# Altium PCB PCB1.PcbDoc
Units mm, origin at the board's own origin, x right, y up, seen from the top; angles counter-clockwise.
Board outline 36 x 36 mm, 4 copper layers (Top Layer, Mid Layer 1, Mid Layer 2, Bottom Layer), stack 1.57 mm thick; 39 components, 28 nets, 148 pads, 37 vias.
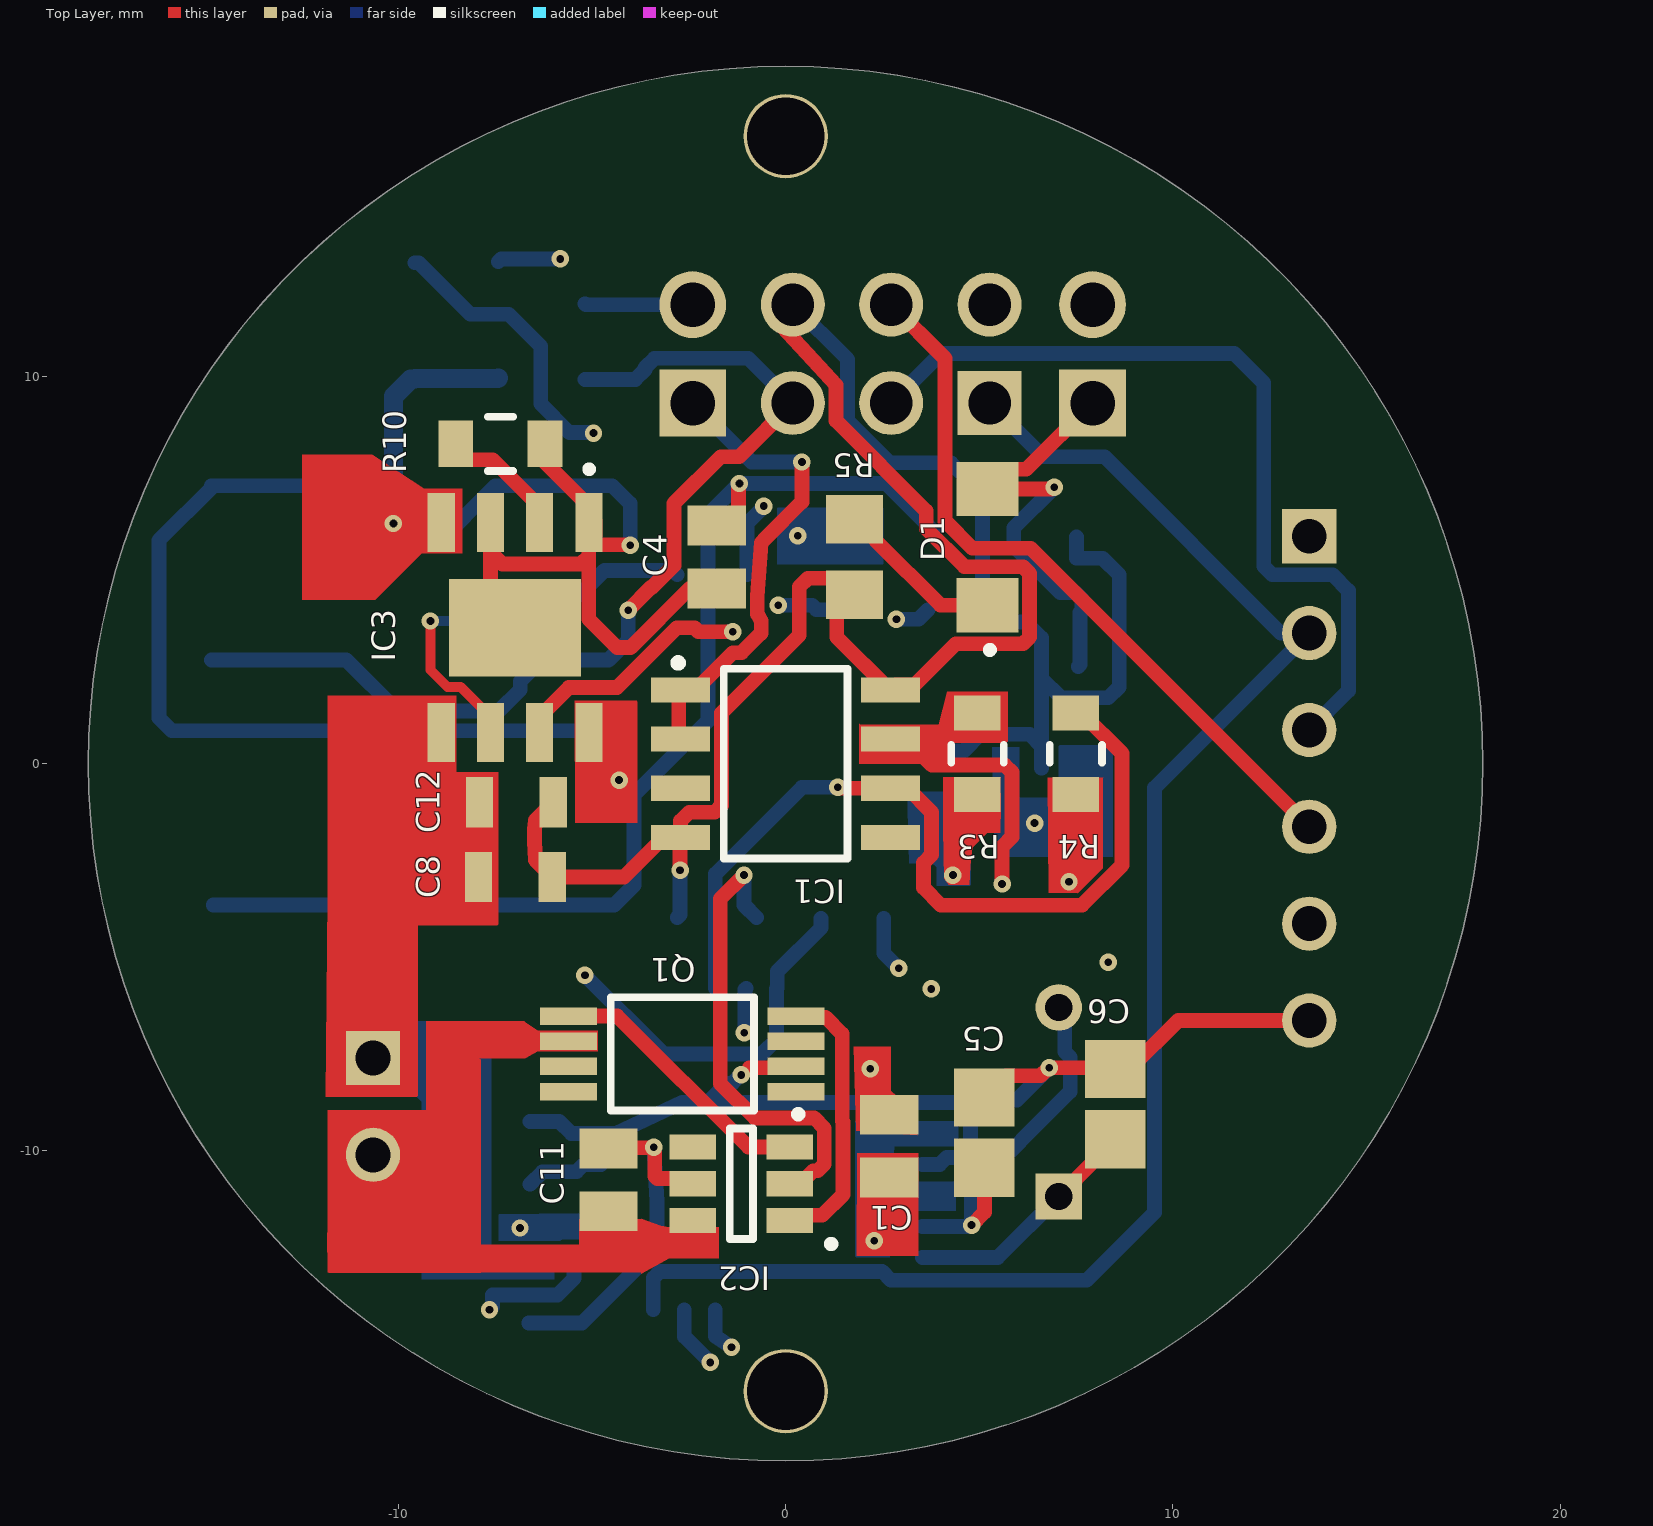
[diagram p0: Top Layer view]
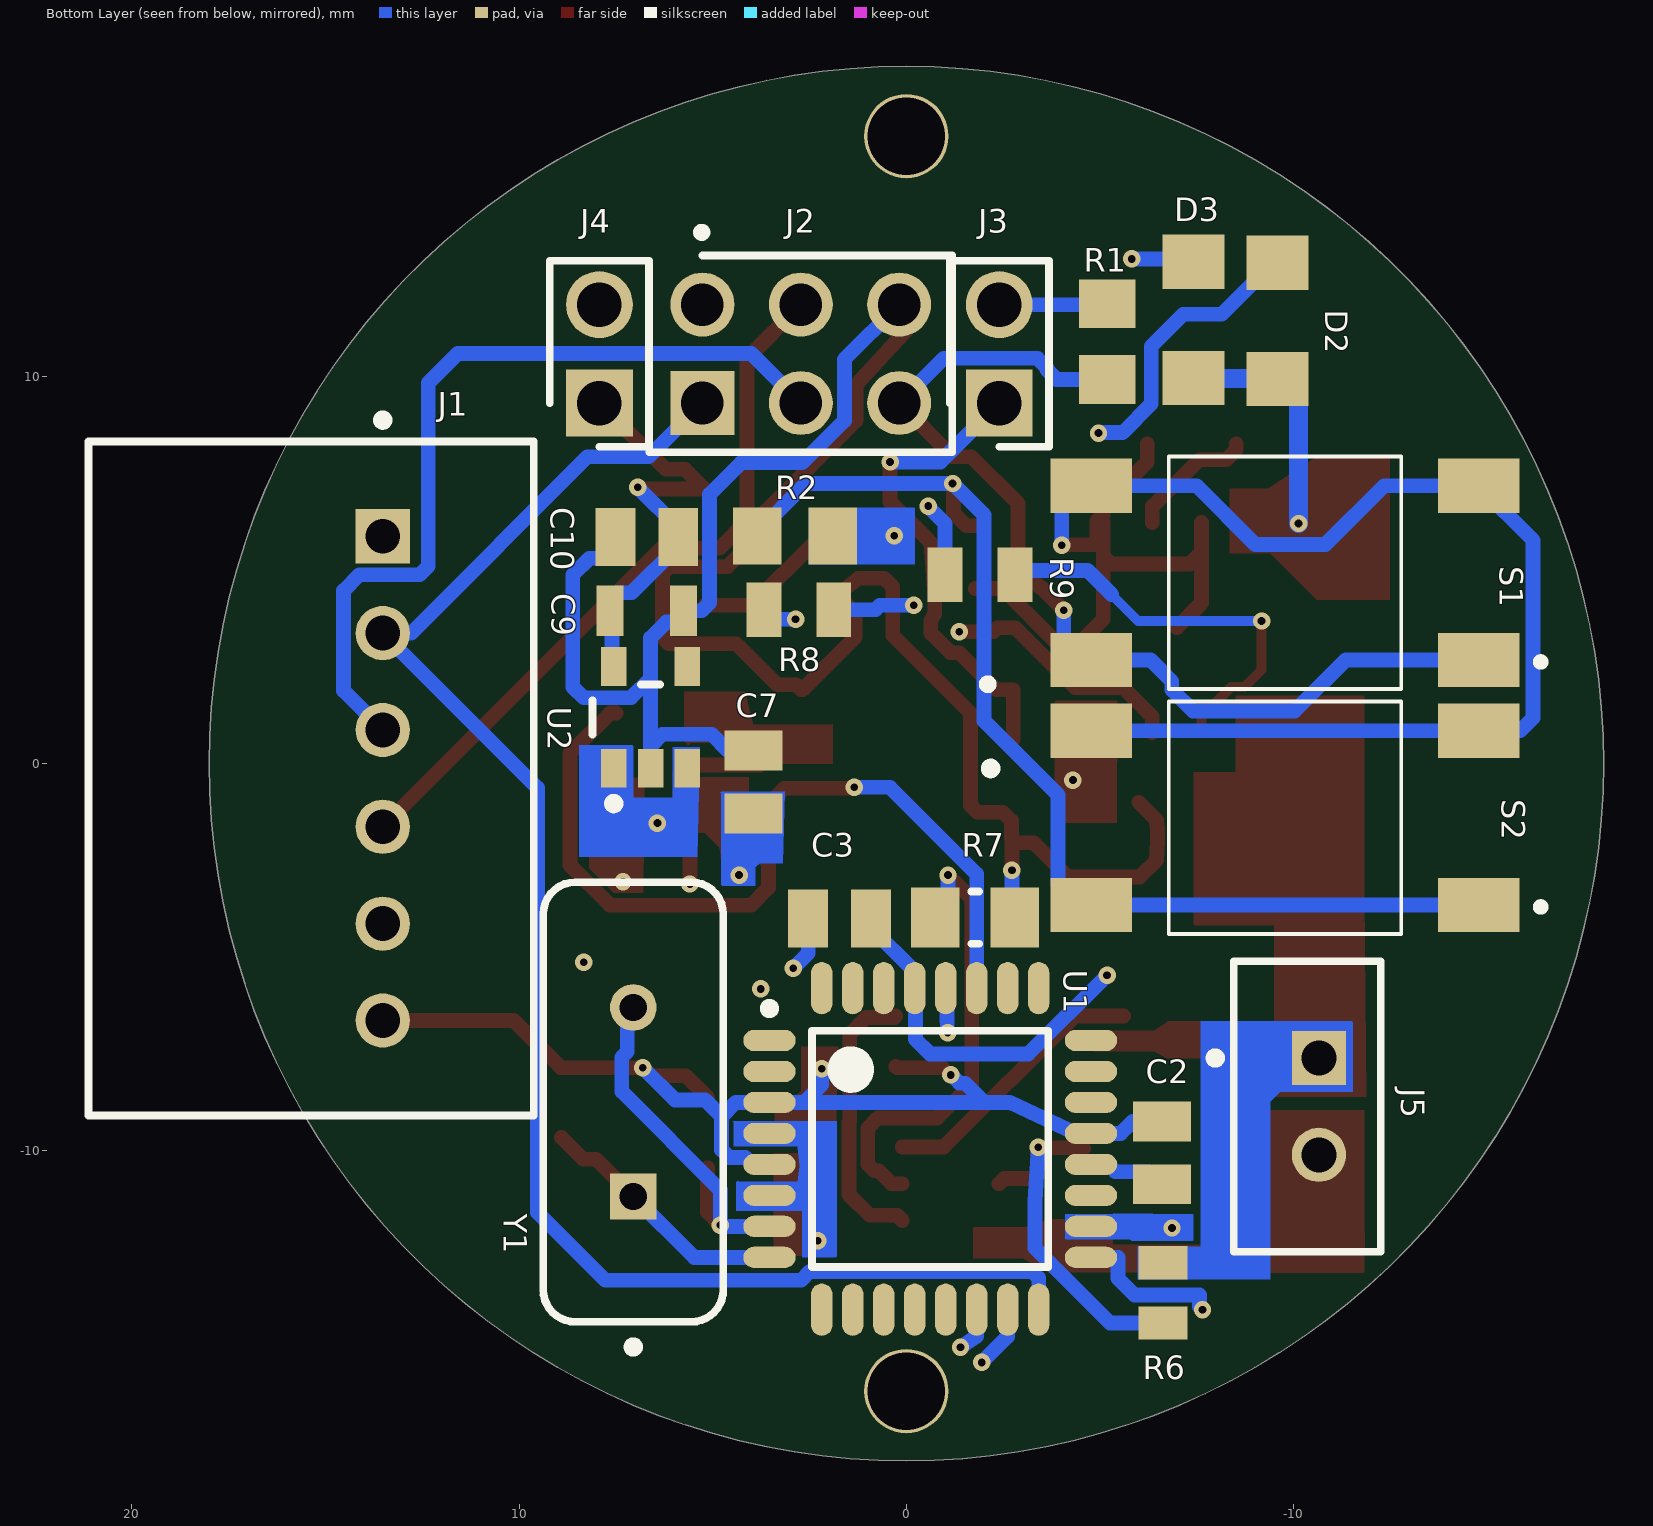
[diagram p1: Bottom Layer view, seen from below]
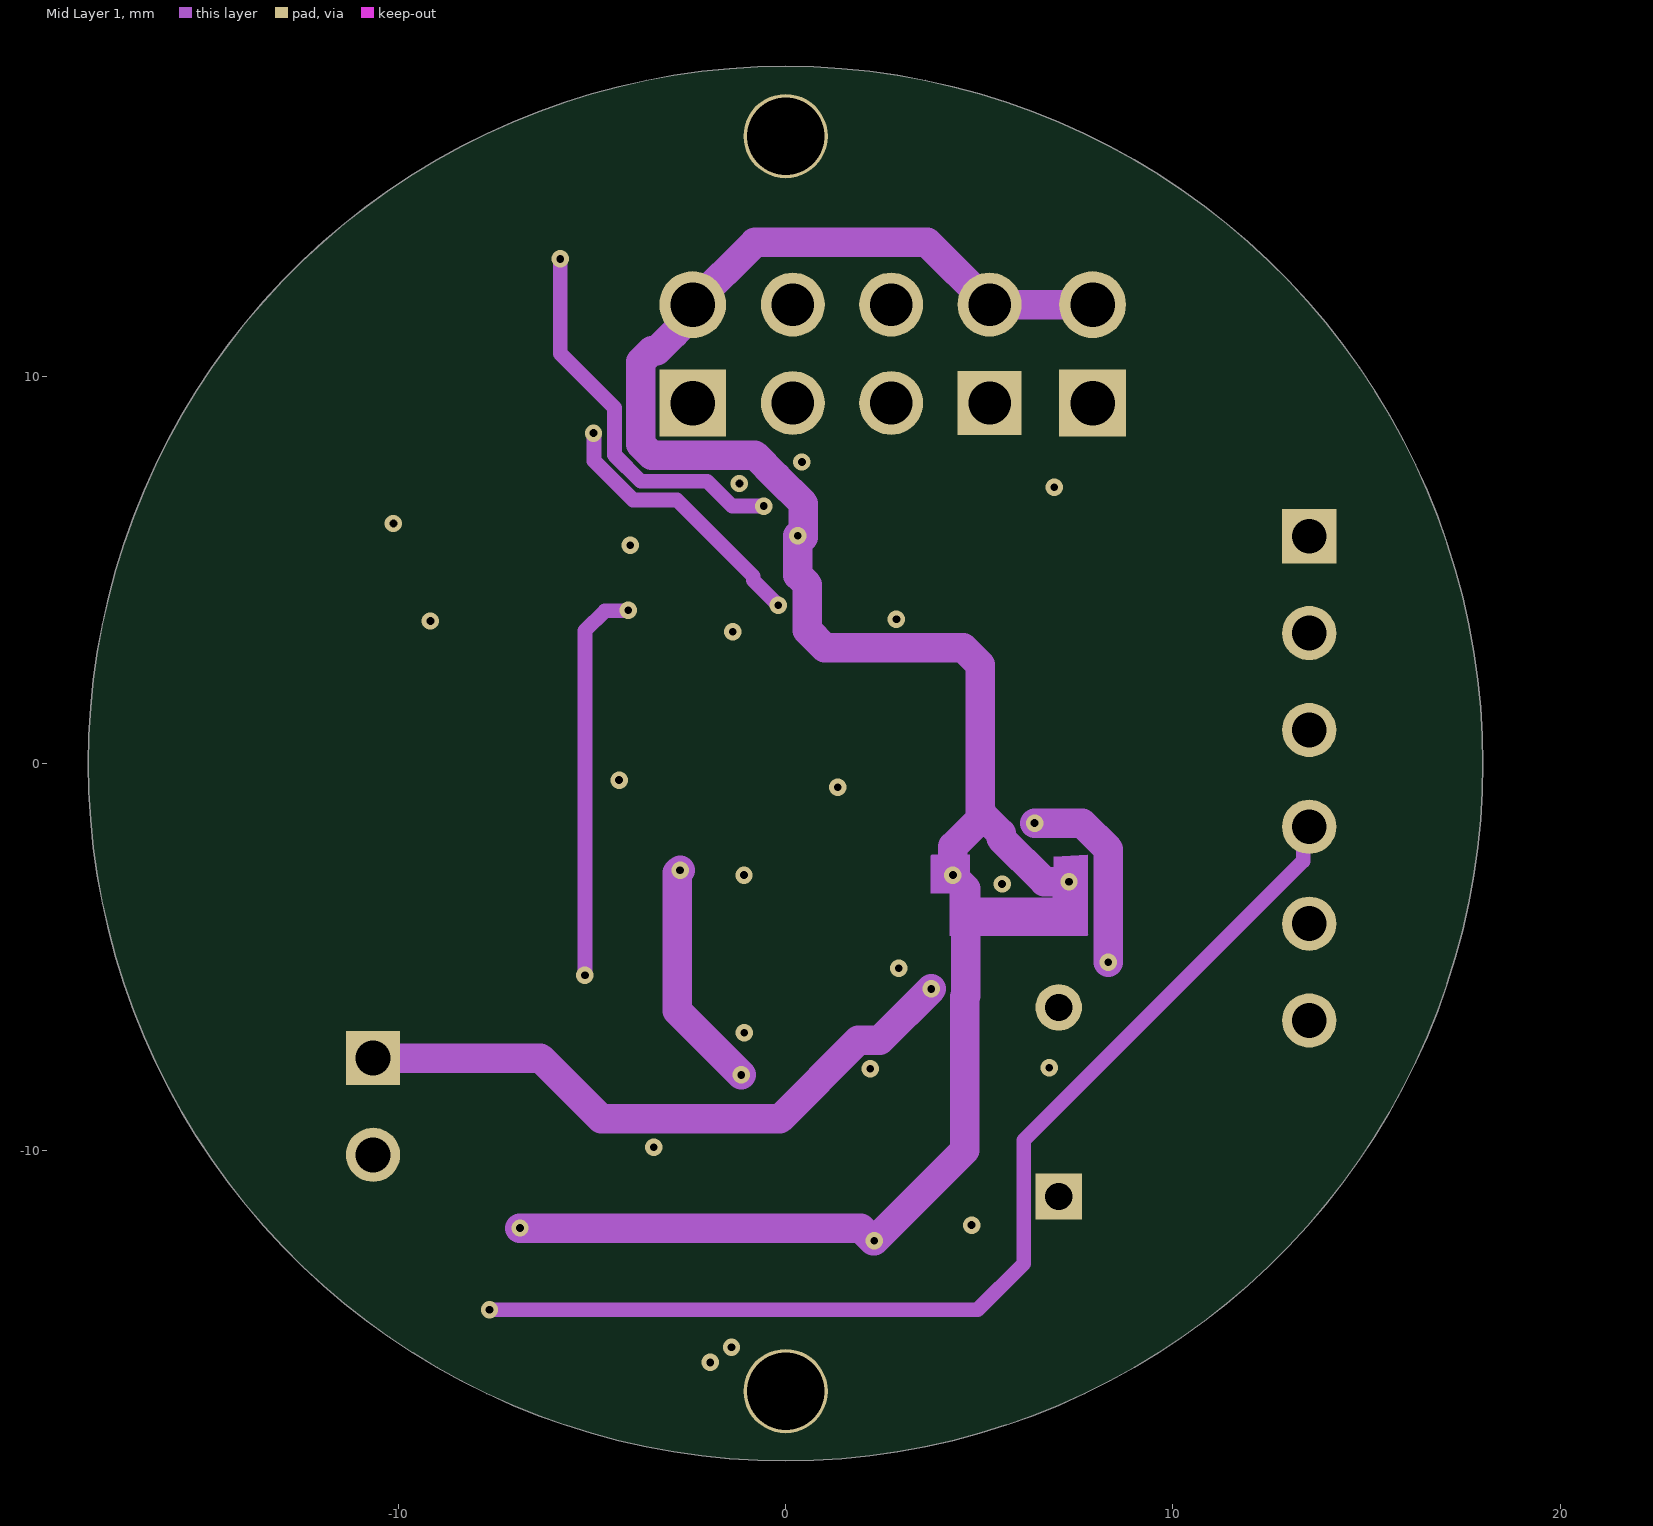
[diagram p2: Mid Layer 1]
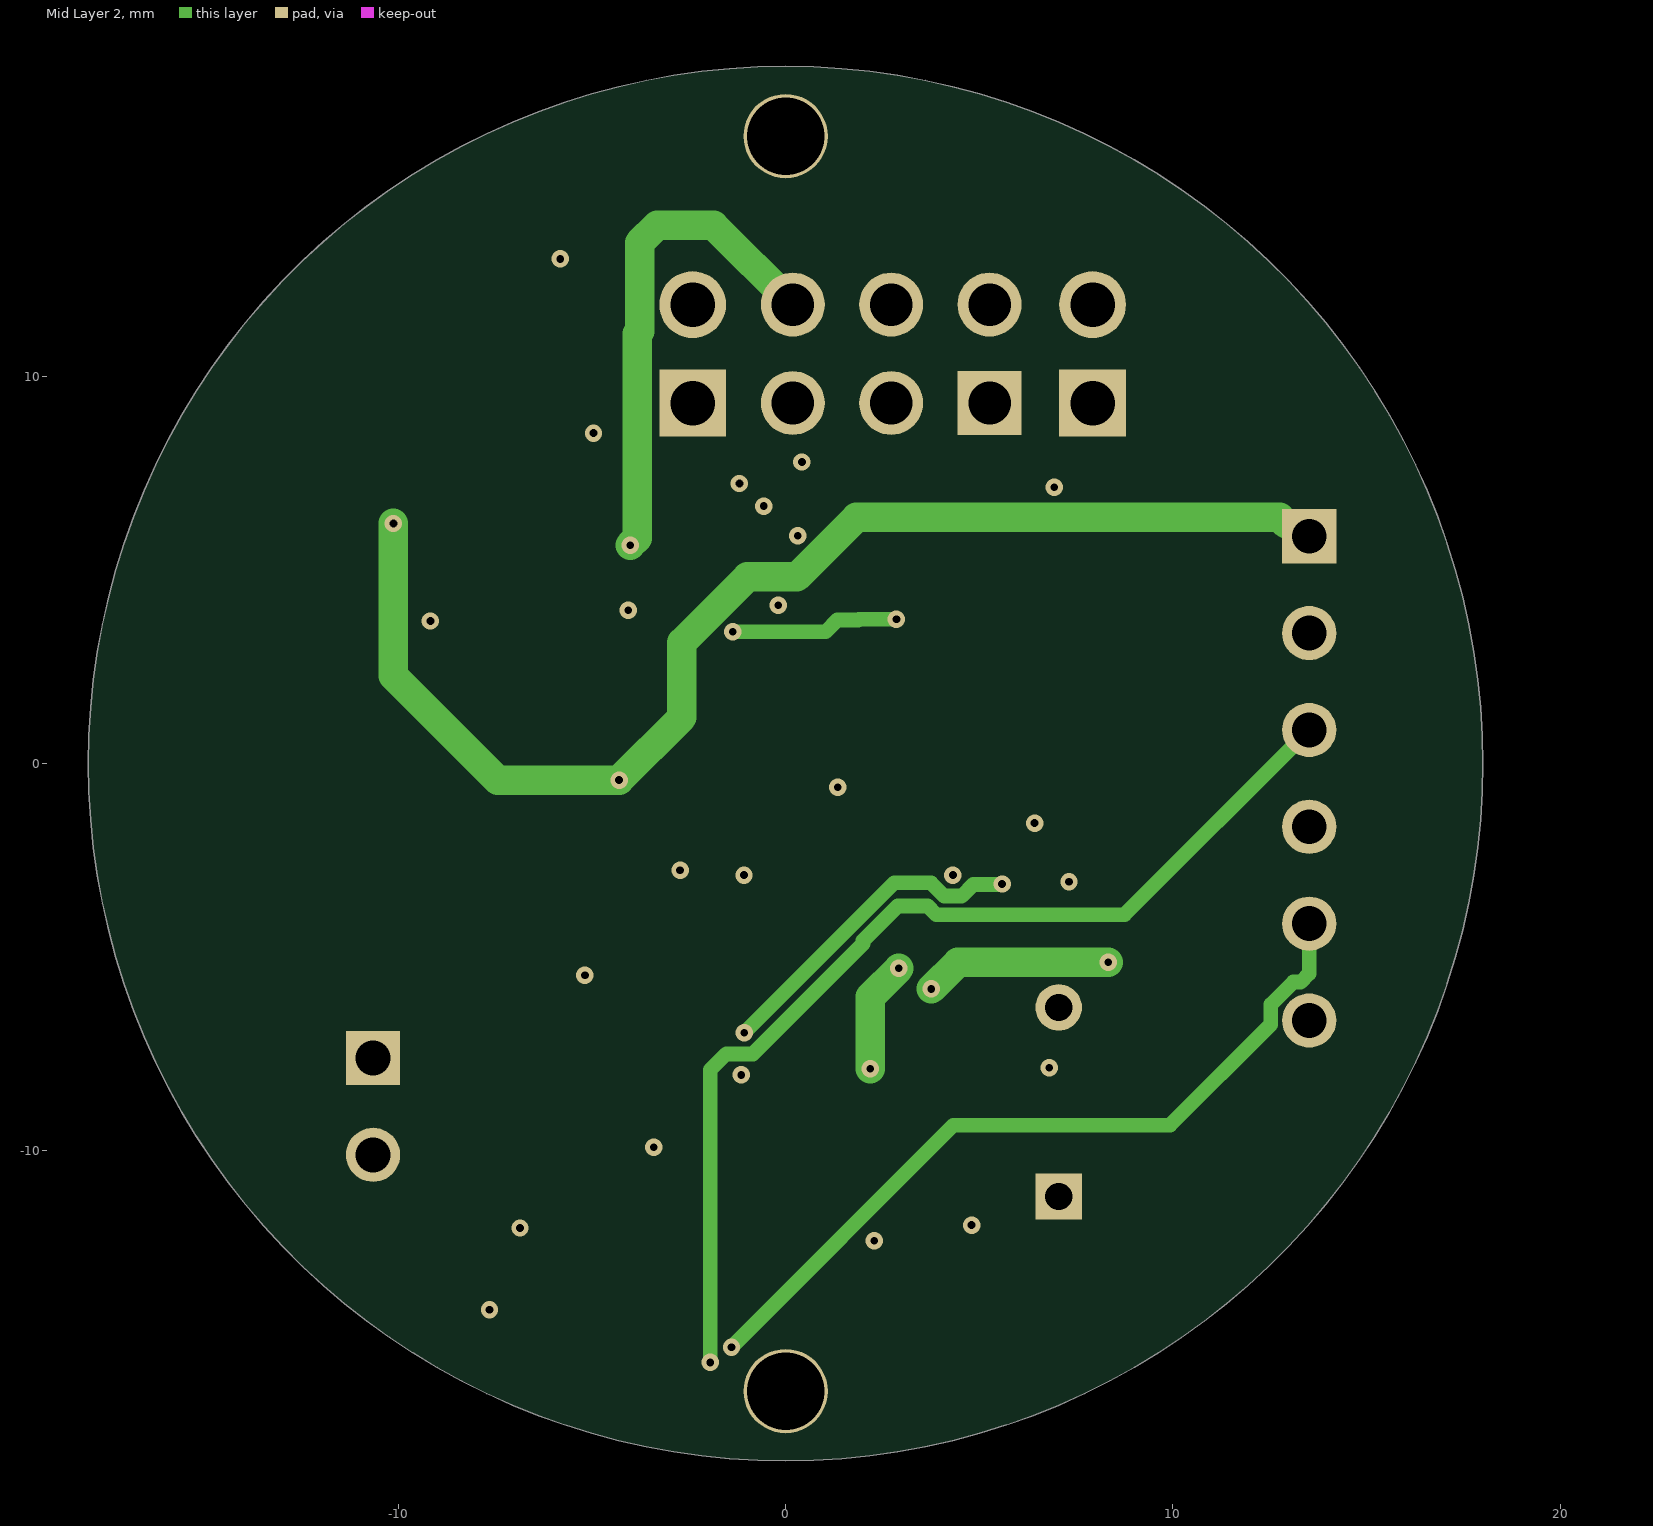
[diagram p3: Mid Layer 2]
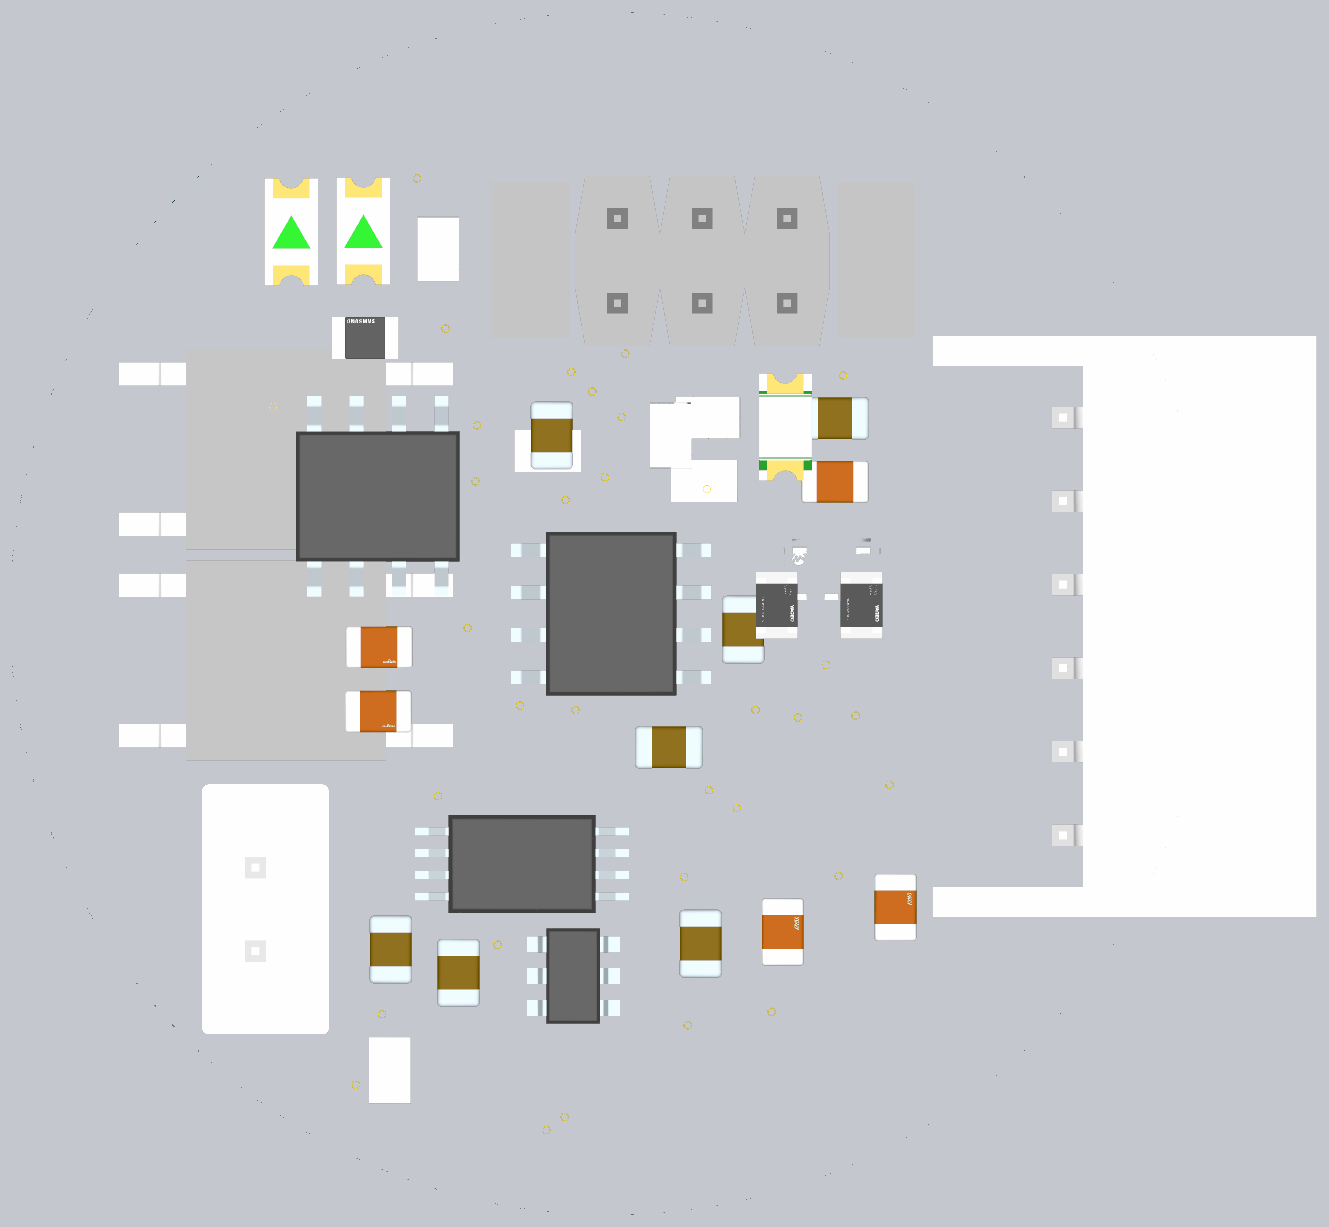
[diagram p4: 3D render of the assembled board from above, using the file's embedded part models]
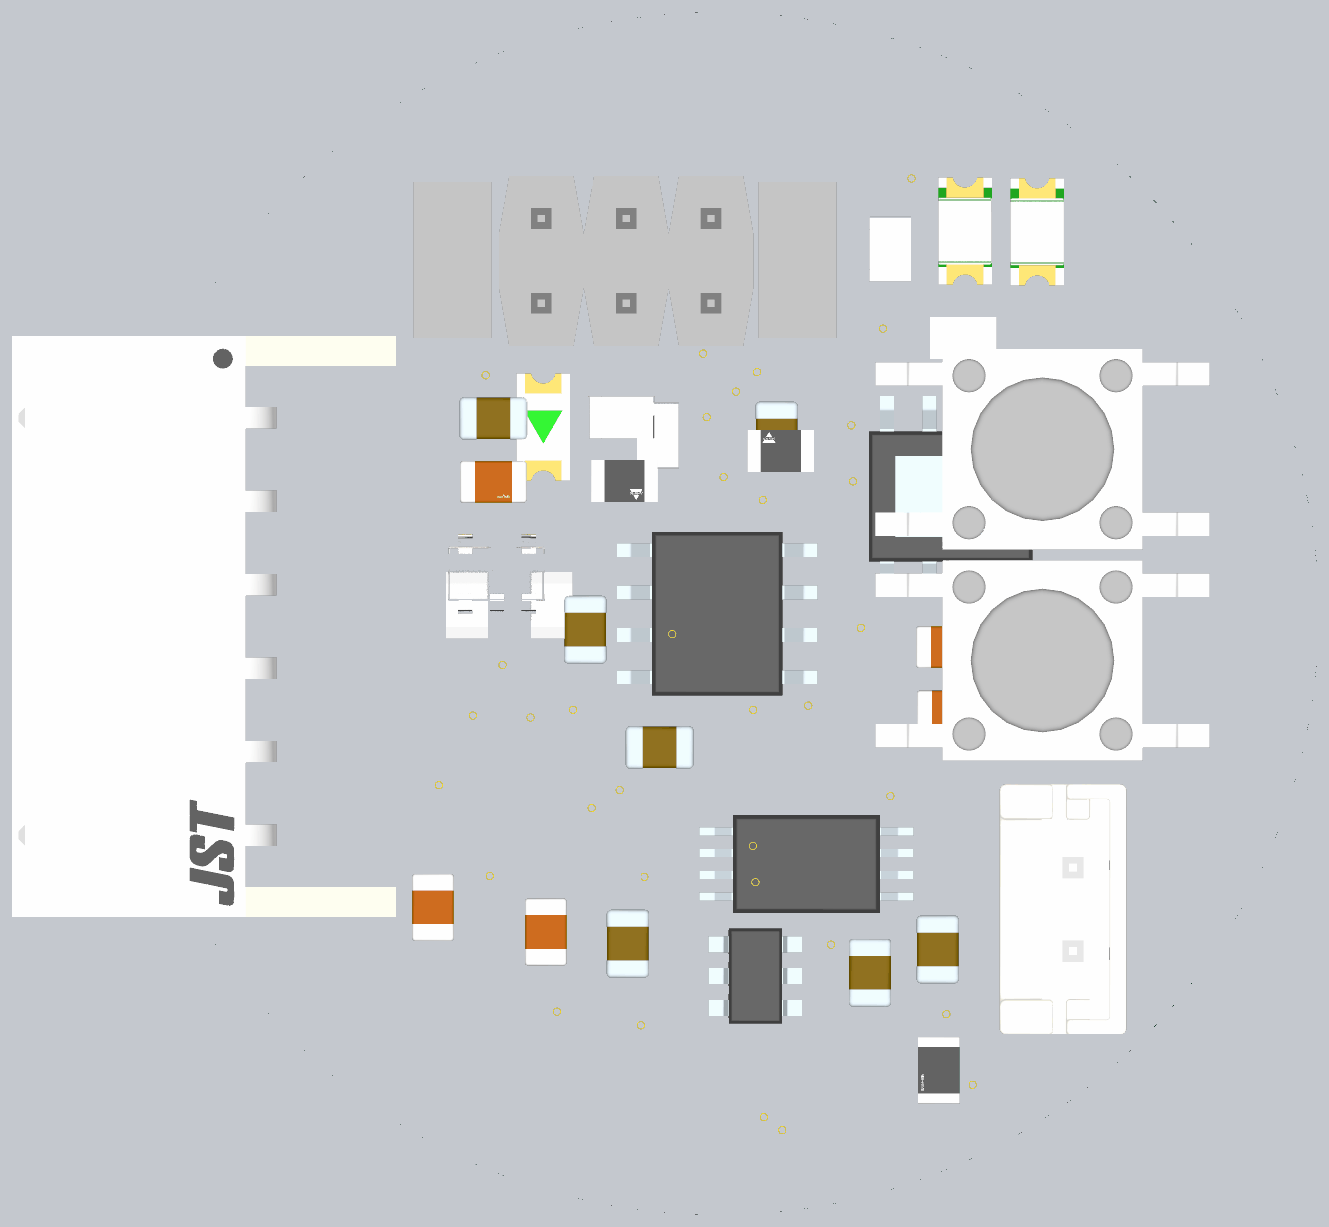
[diagram p5: 3D render of the assembled board from below, using the file's embedded part models]

## Layer stack, top to bottom
Top Solder: solder mask 0.0127, Solder Resist, Dk 3.8
Top Layer: signal copper 0.035
Dielectric 1: prepreg 0.1, 2313, Dk 4.05
Mid Layer 1: signal copper 0.0175
Core: core 1.265, FR-4, Dk 4.5
Mid Layer 2: signal copper 0.0175
Dielectric 2: prepreg 0.1, 2313, Dk 4.05
Bottom Layer: signal copper 0.035
Bottom Solder: solder mask 0.0127, Solder Resist, Dk 3.8

## Board outline
-18,0 ccw(c0,0) 0,-18 ccw(c0,0) 18,0 ccw(c0,0) 0,18 ccw(c0,0)

## Design rules (kind name [scope] priority, off if disabled: settings)
BoardOutlineClearance [All] p1: gap=0.2 ignorepadtopadclearanceinfootprint=FALSE
Clearance [All] p1: gap=0.102 ignorepadtopadclearanceinfootprint=FALSE except(0.127: Arc-Via Track-Via SMDPad-Via THPad-Via Via-Via Via-Fill Via-Poly Via-Region Via-Text; 0.25: Arc-Hole Track-Hole SMDPad-Hole THPad-Hole Via-Hole Fill-Hole Poly-Hole Region-Hole Text-Hole)
ComponentClearance [All] p1: gap=0.102 collisioncheckmode=3 verticalgap=0.102 showdistances=TRUE
DiffPairsRouting [All] p1: maxlimit=0.102 minlimit=0.102 mostfreqgap=0.102 toplayer_minwidth=0.102 toplayer_maxwidth=1816.048 toplayer_prefwidth=0.102 midlayer1_minwidth=0.102 midlayer1_maxwidth=1816.048 midlayer1_prefwidth=0.102 midlayer2_minwidth=0.102 midlayer2_maxwidth=1816.048 midlayer2_prefwidth=0.102 bottomlayer_minwidth=0.102 bottomlayer_maxwidth=1816.048 bottomlayer_prefwidth=0.102 maxuncoupledlength=12.7
Height [All] p1: minheight=0 maxheight=1816.048 prefheight=12.7
HoleSize [All] p1: absolutevalues=TRUE maxlimit=6.3 minlimit=0.2 maxpercent=80.000 minpercent=20.000
HoleToHoleClearance [All] p1: gap=0.25 allowstackedmicrovias=FALSE
MinimumAnnularRing [All] p1: minimumring=0.076
MinimumSolderMaskSliver [All] p1: minsoldermaskwidth=0
PlaneClearance [All] p1: clearance=0.102
PlaneConnect PlaneConnectPowerPads [InPadClass('PowerPads')] p1: planeconnectstyle=Direct reliefexpansion=0.508 reliefentries=4 reliefconductorwidth=0.254 reliefairgap=0.254
PlaneConnect [All] p2: pad.planeconnectstyle=Relief pad.reliefexpansion=0.3 pad.reliefentries=4 pad.reliefconductorwidth=0.102 pad.reliefairgap=0.102 via.planeconnectstyle=Direct via.reliefexpansion=0.3 via.reliefentries=4 via.reliefconductorwidth=0.127 via.reliefairgap=0.127
PolygonConnect PolygonConnectPowerPads [All vs (InPadClass('PowerPads'))] p1: connectstyle=Direct reliefconductorwidth=0.254 reliefentries=4 polygonreliefangle="90 Angle" airgapwidth=0.254
PolygonConnect [All] p2: thpad.connectstyle=Relief thpad.reliefconductorwidth=0.102 thpad.reliefentries=4 thpad.polygonreliefangle="90 Angle" thpad.airgapwidth=0.102 smdpad.connectstyle=Relief smdpad.reliefconductorwidth=0.102 smdpad.reliefentries=4 smdpad.polygonreliefangle="90 Angle" smdpad.airgapwidth=0.102 via.connectstyle=Direct via.reliefconductorwidth=0.127 via.reliefentries=4 via.polygonreliefangle="90 Angle" via.airgapwidth=0.127
RoutingVias [All] p1: holewidth=0.2 width=0.45 viastyle="Through Hole" minholewidth=0.2 minwidth=0.45 maxholewidth=6.3 maxwidth=6.55
SilkToSilkClearance [All] p1: silktosilkclearance=0
SilkToSolderMaskClearance [IsPad] p1: minsilkscreentomaskgap=0.102 clearancetoexposedcopper=TRUE
SolderMaskExpansion [All] p1: expansion=0.075 istentingtop=FALSE
Width [All] p1: maxlimit=1816.048 minlimit=0.102 preferedwidth=0.381
20 further rules are at their usual default settings.

## Classes and differential pairs
component class "Voltage Regulator Circuit": C8 C9 C10 D1 J4 R5 U2
component class "Microcontroller Circuit": C1 C2 C3 C4 C5 C6 J2 R1 S1 S2 U1 Y1
component class "Hall Effect IC Circuit": C7 IC1 J3 R3 R4
component class "Encode Schematic": J1
component class "Battery Protection Circuit": C11 IC2 J5 Q1 R6 R7
component class "Battery Charging Circuit": C12 D2 D3 IC3 R8 R9 R10

## Components (designator, comment, footprint, x,y, rotation, side; value= is the part's Value field where it differs from the comment)
C1 "0805B104K500NT" CAPC2013X137N 2.675,-9.875 r90 top value=100nF
C2 "0805B104K500NT" CAPC2013X137N -6.6,-10.05 r90 bottom value=100nF
C3 "0805B104K500NT" CAPC2013X137N 1.725,-4 r0 bottom value=100nF
C4 "0805B104K500NT" CAPC2013X137N -1.778,5.334 r270 top value=100nF
C5 "08051A220K4T2A" FP-0805-L_2_01_0_2-W_1_25-IPC_A 5.131,-9.525 r90 top
C6 "08051A220K4T2A" FP-0805-L_2_01_0_2-W_1_25-IPC_A 8.509,-8.788 r90 top
C7 "0805B104K500NT" CAPC2013X137N 3.95,-0.475 r90 bottom value=100nF
C8 "GCM21BC71E106KE36L" FP-GCM21B-0_2-e0_2_0_7-MFG -6.975,-2.925 r0 top value=10uF
C9 "GCM21BC71E106KE36L" FP-GCM21B-0_2-e0_2_0_7-MFG 6.7,3.95 r180 bottom value=10uF
C10 "0805B104K500NT" CAPC2013X137N 6.7,5.85 r0 bottom value=100nF
C11 "0805B104K500NT" CAPC2013X137N -4.572,-10.747 r270 top value=100nF
C12 "GCM21BC71E106KE36L" FP-GCM21B-0_2-e0_2_0_7-MFG -6.95,-1 r0 top value=10uF
D1 "150120BS75000" WL-SMCW_1206_150120xx75000 5.207,5.588 r90 top
D2 "150120AS75000" WL-SMCW_1206_150120xx75000 -9.576,11.43 r270 bottom
D3 "150120GS75000" WL-SMCW_1206_150120xx75000 -7.417,11.455 r270 bottom
IC1 "AS5600-ASOM" SOIC127P600X175-8N 0,0 r0 top
IC2 "DW01A-G" SOT95P280X135-6N -1.143,-10.846 r180 top
IC3 "TP4056" SOIC127P600X175-9N -6.985,3.511 r270 top
J1 "S6B-XH-A-1(LF)(SN)" FP-S6B-XH-A-1_LF_SN-MFG 15.367,-0.381 r90 bottom
J2 "90131-0763" HDRV6W90P254_2X3_762X500X560P 5.265,9.31 r180 bottom
J3 "87527-2" HDRV2W66P0X254_1X2_467X244X1044P -2.4,9.309 r270 bottom
J4 "87527-2" HDRV2W66P0X254_1X2_467X244X1044P 7.925,9.309 r270 bottom
J5 "BATTERY IN" FP-B2B-EH-A_LF_SN-MFG -10.35,-8.85 r270 bottom
Q1 "FS8205A" SOP65P640X120-8N -2.667,-7.493 r180 top
R1 "CR0805-FX-1002ELF" FP-CR0805-IPC_A -5.182,10.897 r90 bottom value=10kΩ
R2 "CR0805-FX-1002ELF" FP-CR0805-IPC_A 2.875,5.875 r180 bottom value=10kΩ
R3 "RT0805DRE074K7L" FP-RT0805-MFG 4.953,0.254 r270 top value=4.7kΩ
R4 "RT0805DRE074K7L" FP-RT0805-MFG 7.493,0.254 r270 top value=4.7kΩ
R5 "CR0805-FX-1002ELF" FP-CR0805-IPC_A 1.778,5.334 r90 top value=10kΩ
R6 "ESR10EZPF1000" FP-ESR10-IPC_C -6.629,-13.665 r90 bottom
R7 "RK73B2ATTD102J" RESC2013X60X30ML20T20 -1.775,-3.975 r0 bottom value=1kΩ
R8 "MCU08050D6800BP500" FP-MCU0805-MFG 2.775,3.975 r180 bottom value=680Ω
R9 "MCU08050D6800BP500" FP-MCU0805-MFG -1.9,4.875 r0 bottom value=680Ω
R10 "RC2012F202CS" FP-RC2012-MFG -7.366,8.255 r180 top value=2kΩ
S1 "1301.9315.24" 13019319 -10.625,4.925 r0 bottom
S2 "1301.9315.24" 13019319 -10.625,-1.4 r0 bottom
U1 "ATmega88PA-AU" 32A_L -0.616,-9.947 r180 bottom
U2 "MIC5205-3.3YM5-TR" FP-M5-MFG 6.604,1.194 r90 bottom
Y1 "FOXSLF/080-20" FOX-FOXSLF080-20 7.05,-8.735 r90 bottom value=8MHz

## Footprints (in the part's own frame and the unit in brackets; to place one, negate y for a bottom-side part, rotate by r counter-clockwise, add the part's x,y. Pads: shape width x height; smd on the part's side, far side on the other; paste and mask are expansions set on the pad)
32A_L [mm] "Thin QFP, 32-Leads, Body 7x7mm, Pitch 0.8mm, IPC High Density"
  oval 1.35x0.55 smd: 1(-4.15,2.8) 2(-4.15,2) 3(-4.15,1.2) 4(-4.15,0.4) 5(-4.15,-0.4) 6(-4.15,-1.2) 7(-4.15,-2) 8(-4.15,-2.8) 17(4.15,-2.8) 18(4.15,-2) 19(4.15,-1.2) 20(4.15,-0.4) 21(4.15,0.4) 22(4.15,1.2) 23(4.15,2) 24(4.15,2.8)
  oval 0.55x1.35 smd: 9(-2.8,-4.15) 10(-2,-4.15) 11(-1.2,-4.15) 12(-0.4,-4.15) 13(0.4,-4.15) 14(1.2,-4.15) 15(2,-4.15) 16(2.8,-4.15) 25(2.8,4.15) 26(2,4.15) 27(1.2,4.15) 28(0.4,4.15) 29(-0.4,4.15) 30(-1.2,4.15) 31(-2,4.15) 32(-2.8,4.15)
  silkscreen extent -4.28,-3.05 3.05,3.75, body extent -3.5,-3.5 3.5,3.5, height 1.2
13019319 [mm]
  rect 2.1x1.4 smd: 1(-4.15,2.25) 2(5.85,2.25) 3(-4.15,-2.25) 4(5.85,-2.25)
  silkscreen extent -5.85,-3 3.85,3, body extent -4.11,-3 5.89,3, height 4.31
CAPC2013X137N [mm]
  rect 1.03x1.5 smd: 1(-0.81,0) 2(0.81,0)
  body extent -1.01,-0.64 1.01,0.64, height 1.37
FOX-FOXSLF080-20 [mm] "THD, 2-Leads, Body 11.35x4.65mm"
  rect 1.2x1.2 hole 0.7: 1(-2.44,0)
  round 1.2 hole 0.7: 2(2.44,0)
  silkscreen extent -6.45,-2.32 5.68,2.33, body extent -5.67,-2.32 5.68,2.33, height 3.6
FP-0805-L_2_01_0_2-W_1_25-IPC_A [mm]
  rect 1.505x1.556 smd paste+0 mask+0: 1(-0.906,0) 2(0.906,0)
  body extent -2.16,-1.28 2.16,1.28, height 0.25
FP-B2B-EH-A_LF_SN-MFG [mm]
  rect 1.4x1.4 hole 0.9 paste-2539.97 mask+0: 1(-1.25,0.3)
  round 1.4 hole 0.9 paste-2539.97 mask+0: 2(1.25,0.3)
  silkscreen extent -3.75,-2.5 3.75,1.9, body extent -3.75,-1.9 3.75,1.9, height 6
FP-CR0805-IPC_A [mm]
  rect 1.258x1.462 smd paste+0 mask+0: 1(-0.977,0) 2(0.977,0)
  body extent -1,-0.63 1,0.63, height 0.6
FP-ESR10-IPC_C [mm]
  rect 0.858x1.262 smd paste+0 mask+0: 1(-0.777,0) 2(0.777,0)
  body extent -1,-0.63 1,0.63, height 0.65
FP-GCM21B-0_2-e0_2_0_7-MFG [mm]
  rect 0.7x1.3 smd paste+0 mask+0: 1(-0.95,0) 2(0.95,0)
  body extent -1.4,-0.82 1.4,0.82, height 0.25
FP-M5-MFG [mm]
  rect 1x0.66 smd paste+0 mask+0: 1(-1.315,0.95) 2(-1.315,0) 3(-1.315,-0.95) 4(1.315,-0.95) 5(1.315,0.95)
  silkscreen extent -2.35,-0.25 0.85,1.5, body extent -1.4,-1.46 1.4,1.46, height 1.3
FP-MCU0805-MFG [mm]
  rect 0.9x1.4 smd paste+0 mask+0: 1(-0.9,0) 2(0.9,0)
  body extent -1,-0.63 1,0.63, height 0.55
FP-RC2012-MFG [mm]
  rect 0.9x1.2 smd paste+0 mask+0: 1(-1.15,0) 2(1.15,0)
  silkscreen extent -0.33,-0.7 0.33,0.7, body extent -1.7,-0.8 1.7,0.8, height 0.25
FP-RT0805-MFG [mm]
  rect 0.9x1.2 smd paste+0 mask+0: 1(-1.05,0) 2(1.05,0)
  silkscreen extent -0.22,-0.67 0.22,0.67, body extent -1.6,-0.77 1.6,0.77, height 0.25
FP-S6B-XH-A-1_LF_SN-MFG [mm]
  rect 1.4x1.4 hole 0.9 paste-2539.97 mask+0: 1(6.25,-1.85)
  round 1.4 hole 0.9 paste-2539.97 mask+0: 2(3.75,-1.85) 3(1.25,-1.85) 4(-1.25,-1.85) 5(-3.75,-1.85) 6(-6.25,-1.85)
  silkscreen extent -8.7,-5.75 9.37,5.75, body extent -8.7,-5.75 8.7,5.75, height 6.1
HDRV2W66P0X254_1X2_467X244X1044P [mm]
  rect 1.725x1.725 hole 1.15: 1(0,0)
  round 1.725 hole 1.15: 2(-2.54,0)
  silkscreen extent -3.67,-1.28 1.13,1.28, body extent -3.61,-1.17 1.07,1.17, height 10.83
HDRV6W90P254_2X3_762X500X560P [mm]
  rect 1.65x1.65 hole 1.1: 1(0,0)
  round 1.65 hole 1.1: 2(0,2.54) 3(2.54,0) 4(2.54,2.54) 5(5.08,0) 6(5.08,2.54)
  silkscreen extent -1.37,-1.27 6.45,3.81, body extent -1.27,-1.29 6.35,3.79, height 9.26
RESC2013X60X30ML20T20 [mm] "Chip Resistor, 2-Leads, Body 2.00x1.25mm, IPC Low Density"
  rect 1.25x1.55 smd: 1(-1.025,0) 2(1.025,0)
  silkscreen extent -0.1,-0.67 0.1,0.68, body extent -1.1,-0.72 1.1,0.72, height 0.6
SOIC127P600X175-8N [mm]
  rect 1.525x0.65 smd: 1(-2.712,1.905) 2(-2.712,0.635) 3(-2.712,-0.635) 4(-2.712,-1.905) 5(2.712,-1.905) 6(2.712,-0.635) 7(2.712,0.635) 8(2.712,1.905)
  silkscreen extent -1.6,-2.45 1.6,2.45, body extent -3,-2.45 3,2.45, height 1.75
SOIC127P600X175-9N [mm]
  rect 1.525x0.7 smd: 1(-2.712,1.905) 2(-2.712,0.635) 3(-2.712,-0.635) 4(-2.712,-1.905) 5(2.712,-1.905) 6(2.712,-0.635) 7(2.712,0.635) 8(2.712,1.905)
  rect 2.513x3.402 smd: 9(0,0)
  body extent -3,-2.45 3,2.45, height 1.75
SOP65P640X120-8N [mm]
  rect 1.475x0.45 smd: 1(-2.938,0.975) 2(-2.938,0.325) 3(-2.938,-0.325) 4(-2.938,-0.975) 5(2.938,-0.975) 6(2.938,-0.325) 7(2.938,0.325) 8(2.938,0.975)
  silkscreen extent -1.85,-1.47 1.85,1.47, body extent -3.2,-1.47 3.2,1.47, height 1.2
SOT95P280X135-6N [mm]
  rect 1.2x0.65 smd: 1(-1.25,0.95) 2(-1.25,0) 3(-1.25,-0.95) 4(1.25,-0.95) 5(1.25,0) 6(1.25,0.95)
  silkscreen extent -0.3,-1.42 0.3,1.42, body extent -1.4,-1.43 1.4,1.43, height 1.35
WL-SMCW_1206_150120xx75000 [mm] "SMD Mono-color Chip LED, body 3.2x1.6mm"
  rect 1.4x1.6 smd: 1(-1.5,0) 2(1.5,0)
  body extent -1.6,-0.8 1.6,0.8, height 0.68

## Part data
C1 C2 C3 C4 C7 C10 C11: "Capacitor", Manufacturer_Name=Novacap, Mouser Part Number=767-0805B104K500NT, Datasheet Link=https://componentsearchengine.com/Datasheets/1/0805B104K500NT.pdf, Height=1.37mm, Manufacturer_Part_Number=0805B104K500NT, Mouser Price/Stock=https://www.mouser.com/Search/Refine.aspx?Keyword=767-0805B104K500NT
C5 C6: library part CMP-04427-002582-1, "Automotive Ceramic Capacitor, 0805, 22pF, 10%, C0G, 30ppm/°C, 100V", Capacitance=22pF, Case Code (Imperial)=0805, Case Code (Metric)=2012, Dielectric=C0G, Max Operating Temperature=125°C, Min Operating Temperature=-55°C, Package Quantity=4000, Ratings=AEC-Q200, Tolerance=10%, Voltage Rating=100V, Case/Package=0805, Construction=Flat, Depth=1.25mm, Length=2.01mm, Mount="Surface Mount", Number of Pins=2, Packaging="Tape and Reel", Radiation Hardening=No, RoHS Compliant=Yes, Series=-, Termination=SMD/SMT, Thickness=0.037inch, Voltage Rating (DC)=100V, Width=1.2mm
C8 C9 C12: library part CMP-06035-063206-1, "10 µF ±10% 25V Ceramic Capacitor X7S 0805 (2012 Metric)"
D1: library part CMP-1426-00015-2, Case Code (Imperial)=1206, Case Code (Metric)=3216, Color=Blue, Forward Current=100mA, Forward Voltage=3.2V, Manufacturer Package Identifier=LED_1206, Max Operating Temperature=85°C, Max Reverse Voltage (DC)=5V, Min Operating Temperature=-40°C, Test Current=20mA, Case/Package=1206, Dominant Wavelength=470nm, Height=680µm, Length=3.2mm, Lens Style="Clear, Rectangular", Luminous Intensity=145mcd, Mount="Surface Mount", NexarPartId=29717786, Packaging="Tape and Reel", Peak Wavelength=465nm, REACH SVHC=Unknown, RoHS=Compliant, Viewing Angle=140°, Wavelength=470nm, Width=1.6mm
D2: library part CMP-1426-00018-2, Case Code (Imperial)=1206, Case Code (Metric)=3216, Color=Orange, Forward Current=100mA, Forward Voltage=2V, Max Operating Temperature=85°C, Max Reverse Voltage (DC)=5V, Min Operating Temperature=-40°C, Test Current=20mA, Case/Package=1206, Dominant Wavelength=605nm, Height=680µm, Length=3.2mm, Lens Style="Clear, Rectangular", Luminous Intensity=140mcd, Mount="Surface Mount", NexarPartId=29717785, Packaging="Tape and Reel", Peak Wavelength=610nm, REACH SVHC=Unknown, RoHS=Compliant, Viewing Angle=140°, Wavelength=605nm, Width=1.6mm
D3: library part CMP-1426-00014-3, Case Code (Imperial)=1206, Case Code (Metric)=3216, Color=Green, Forward Current=100mA, Forward Voltage=3.2V, Max Junction Temperature (Tj)=95°C, Max Operating Temperature=85°C, Max Reverse Voltage (DC)=5V, Min Operating Temperature=-40°C, Power Dissipation=105mW, Test Current=20mA, Case/Package=1206, Dominant Wavelength=525nm, Height=680µm, Length=3.2mm, Lens Style="Clear, Rectangular", Luminous Intensity=450mcd, Mount="Surface Mount", NexarPartId=29717787, Packaging="Tape and Reel", Peak Wavelength=515nm, REACH SVHC=Unknown, Reverse Voltage=5V, RoHS=Compliant, Viewing Angle=140°, Wavelength=520nm, Width=1.6mm
IC1: "Integrated Circuit", Manufacturer_Name="ams OSRAM", Mouser Part Number=985-AS5600-ASOM, Arrow Part Number=AS5600-ASOM, Arrow Price/Stock=https://www.arrow.com/en/products/as5600-asom/ams-ag?region=nac, Datasheet Link=https://datasheet.datasheetarchive.com/originals/distributors/DKDS-11/214624.pdf, Height=1.75mm, Manufacturer_Part_Number=AS5600-ASOM, Mouser Price/Stock=https://www.mouser.co.uk/ProductDetail/ams/AS5600-ASOM?qs=KTMMzrZdriG6aU1h9lJCUQ%3D%3D
IC2: "Integrated Circuit", Manufacturer_Name="Fortune Semiconductor Corporation", Datasheet Link=http://acoptex.com/uploads/DW01A.pdf, Height=1.35mm, Manufacturer_Part_Number=DW01A-G
IC3: "Connector", Manufacturer_Name="NanJing Top Power", Datasheet Link=https://dlnmh9ip6v2uc.cloudfront.net/datasheets/Prototyping/TP4056.pdf, Height=1.75mm, Manufacturer_Part_Number=TP4056
J1: library part CMP-17439-000023-1, "CONN HEADER R/A P6OS 2.5MM", Color=Natural, Current Rating=3A, Insulation Resistance=1GR, Max Operating Temperature=85°C, Min Operating Temperature=-25°C, Voltage Rating=250V, Contact Material=Brass, Contact Plating=Tin, Gender=Male, Lead Free="Lead Free", Material=Polyamide, Mount="Through Hole", Number of Positions=6, Number of Rows=1, Pitch=2.5mm, Termination=Crimp
J2: "Connector", Manufacturer_Name=Molex, Mouser Part Number=538-90131-0763, Datasheet Link=https://www.molex.com/pdm_docs/sd/901310763_sd.pdf, Height=5.6mm, Manufacturer_Part_Number=90131-0763, Mouser Price/Stock=https://www.mouser.co.uk/ProductDetail/Molex/90131-0763?qs=KObwnG1V4zuKPiIchrbqlw%3D%3D, Name=PROGRAMMER
J3 J4: "Power isolation jumper", Manufacturer_Name="TE Connectivity", Mouser Part Number=571-875272, Arrow Part Number=87527-2, Arrow Price/Stock=https://www.arrow.com/en/products/87527-2/te-connectivity?region=nac, Datasheet Link=https://www.te.com/commerce/DocumentDelivery/DDEController?Action=showdoc&DocId=Customer+Drawing%7F87527%7FH%7Fpdf%7FEnglish%7FENG_CD_87527_H.pdf%7F87527-2, Height=10.439mm, Manufacturer_Part_Number=87527-2, Mouser Price/Stock=https://www.mouser.co.uk/ProductDetail/TE-Connectivity/87527-2?qs=ZDXmSm13593hsB4j%252B6gMfg%3D%3D
J5: library part CMP-17439-000026-1, "B2B-EH-A(LF)(SN), CONN HEADER VERT 2POS 2.5MM", Color=Natural, Contact Resistance=20mR, Current Rating=3A, Housing Color=White, Max Operating Temperature=85°C, Max Voltage Rating (AC)=250V, Min Operating Temperature=-25°C, Connector Type=Plug, Contact Material="Copper Alloy", Contact Mating Length=0.13inch, Contact Plating=Tin, Contact Type="Male Pin", Depth=3.8mm, Fastening Type=Detent, Gender=Male, Housing Material=Nylon, Lead Free="Lead Free", Length=7.5mm, Max Current Rating=3A, Mount="Through Hole", Number of Contacts=2, Number of Positions=2, Number of Rows=1, Orientation=Straight, Packaging=Bulk, Pitch=2.5mm, Series=EH, Termination=Press-Fit, Voltage Rating=250V
Q1: "MOSFET (N-Channel)", Manufacturer_Name=FSC, Datasheet Link=https://datasheet.lcsc.com/szlcsc/Fortune-Semicon-FS8205A_C16052.pdf, Height=1.2mm, Manufacturer_Part_Number=FS8205A
R1 R2 R5: library part CMP-07231-003204-1, "Thick Film Chip Resistors 0805 10kΩ 0.125W 1% 100ppm/°C", Case Code (Imperial)=0805, Case Code (Metric)=2012, Max Operating Temperature=155°C, Max Power Dissipation=125mW, Min Operating Temperature=-55°C, Package Quantity=1, Resistance=10kR, Temperature Coefficient=100ppm/°C, Tolerance=1%, Voltage Rating=150V, Voltage Rating (DC)=100V, Case/Package=0805, Composition="Thick Film", Contact Plating=Tin, Depth=1.25mm, Features="Moisture Resistant", Height=0.5mm, Length=2mm, Mount="Surface Mount", Number of Terminations=2, Packaging="Tape and Reel", Power Rating=125mW, Radiation Hardening=No, REACH SVHC="No SVHC", Termination=SMD/SMT, Thickness=508um, Width=1.25mm
R3 R4: library part CMP-03412-005354-1, "RES SMD 4.7K OHM 0.5% 1/8W 0805", Manufacturer=Yageo, Package=RT0805, Power Rating=0.125W, Resistance=4.7KΩ, Temperature="-55°C to +155°C", Temperature Coefficient="50 ppm/°C", Temperature Range High=+155°C, Temperature Range Low=-55°C, Tolerance=0.01, Voltage Rating=150V, Automotive=No, Category=Res, ComponentLink2Description=Datasheet, ComponentLink2URL=http://www.yageo.com/documents/recent/PYu-RT_1-to-0.01_RoHS_L_9.pdf, Composition="Thin Film", Device Class L1="Passive Components", Device Class L2=Resistors, Device Class L3="Chip SMD Resistors", Digikey Description="RES SMD 4.7K OHM 0.5% 1/8W 0805", Footprint Url=http://www.yageo.com/exep/pages/download/literatures/PYu-R_Mount_10.pdf, Height=0.6mm, Ipc Land Pattern Name=RESC200125X50, Lead Free=Yes, Manufacturer Part Number=RT0805DRE074K7L, Octopart=https://octopart.com/rt0805dre074k7l-yageo-1242027, RoHS=TRUE, Series=RT
R6: library part CMP-08839-028189-1, "100Ω ±1% 0.4W 0805 Anti-Surge Chip Resistor AEC-Q200", Case Code (Imperial)=0805, Case Code (Metric)=2012, Max Operating Temperature=155°C, Max Power Dissipation=400mW, Min Operating Temperature=-55°C, Resistance=100R, Resistor Type="Thick Film", Temperature Coefficient=100ppm/°C, Tolerance=1%, Case/Package=0805, Features="Automotive AEC-Q200", Number of Terminations=2, Packaging="Tape and Reel", RoHS Compliant=Yes, Series=ESR
R7: library part CMP-2001-04656-1, Manufacturer="KOA Speer", Part Number=RK73B2ATTD102J
R8 R9: library part CMP-02407-000244-1, "RES 1.05K OHM 0.5% 1/5W 0805", Case/Package=0805, Max Operating Temperature=125°C, Max Power Dissipation=125mW, Min Operating Temperature=-55°C, Package Quantity=5000, Resistance=680R, Temperature Coefficient=25ppm/°C, Tolerance=0.1%, Composition="Thin Film", Contact Plating=Tin, Depth=1.25mm, Height=0.022inch, Lead Free="Lead Free", Length=0.079inch, Military Standard=Not, Number of Terminations=2, Packaging="Tape and Reel", Radiation Hardening=No, Width=0.049inch
R10: library part CMP-13261-004148-1, "Res Thick Film 0805 2kΩ 1% 0.125W ±100ppm/°C Molded SMD T/R", Case Code (Imperial)=0805, Case Code (Metric)=2012, Max Operating Temperature=155°C, Max Power Dissipation=125mW, Min Operating Temperature=-55°C, Resistance=2kR, Temperature Coefficient=100ppm/°C, Tolerance=1%, Voltage Rating (DC)=150V, Case/Package=0805, Composition="Thick Film", Contact Plating=Tin, Features="Moisture Resistant", Height=0.024inch, Lead Free="Lead Free", Length=0.079inch, Number of Terminations=2, Packaging="Tape and Reel", Radiation Hardening=No, Width=0.049inch
S1 S2: "Switch", Manufacturer_Name=SCHURTER, Mouser Part Number=693-1301.9315.24, Arrow Part Number=1301.9315.24, Arrow Price/Stock=https://www.arrow.com/en/products/1301.9315.24/schurter?region=europe, Datasheet Link=https://www.schurter.com/en/datasheet/typ_6x6_mm_tact_switches.pdf, Height=9mm, Manufacturer_Part_Number=1301.9315.24, Mouser Price/Stock=https://www.mouser.co.uk/ProductDetail/Schurter/1301.9315.24?qs=wYWahoWfBn9TJM14ZGQ%2Fug%3D%3D
U1: library part CMP-0095-00213-2, "8-bit AVR Microcontroller, 8KB Flash, 512 Bytes EEPROM, 1KB SRAM, 32-pin TQFP, Industrial Grade (-40°C to 85°C)", Code_JEDEC=MS-026-ABA, ComponentLink1Description="Manufacturer URL", ComponentLink1URL=http://www.atmel.com/, ComponentLink2Description="ATmega48A/48PA/88A/88PA/168A/168PA/328/328P Datasheet", ComponentLink2URL=http://www.atmel.com/dyn/resources/prod_documents/doc8271.pdf, ComponentLink3Description="ATmega48A/48PA/88A/88PA/168A/168PA/328/328P Summary", ComponentLink3URL=http://www.atmel.com/dyn/resources/prod_documents/8271S.pdf, DatasheetVersion="revD, May-2011", PackageDescription="32-Lead, 7x7x1.0 mm Body, 0.8mm Lead Pitch, Thin Profile Plastic Quad Flat Package (TQFP)", PackageReference=32A, PackageVersion="revC, Oct-2010", RevisionNote="DatasheetVersion & PackageVersion updated. URLs added."
U2: library part CMP-06324-000014-1, "IC REG LINEAR 3.3V 150MA SOT23-5", Dropout Voltage=165mV, Manufacturer=Microchip, Max Junction Temp=+125°C, Max Supply Voltage=16V, Min Supply Voltage=2.5V, Output Current=150mA, Package=M5, Temperature="-40°C to +125°C", Temperature Range Low=-40°C, Accuracy Percentage=2%, Automotive=No, ComponentLink2Description=Datasheet, ComponentLink2URL=http://ww1.microchip.com/downloads/en/DeviceDoc/20005785A.pdf, Device Class L1="Integrated Circuits (ICs)", Device Class L2="Power Management ICs", Device Class L3="Voltage Regulators - Linear", Digikey Description="IC REG LINEAR 3.3V 150MA SOT23-5", Height=1.45mm, Ipc Land Pattern Name=SOT95P280X118-5, Lead Free=Yes, Manufacturer Part Number=MIC5205-3.3YM5-TR, Mouser Description="LDO Voltage Regulators", Number Of Outputs=1, Octopart=https://octopart.com/mic5205-3.3ym5-tr-microchip-66802130, Output Type=Fixed, RoHS=TRUE, Standoff Height=0mm, Temperature Range High=+125°C
Y1: library part CMP-1749-00002-1, "Resistance Weld Thru-Hole Crystal, 8 MHz, -20 to 70 degC, 2-Pin THD, RoHS, Bulk", Case\Package=TO-263-3, Dropout Voltage="2 V", Max Input Voltage="35 V", Max Operating Temperature="125 degC", Max Ouput Current="1 A", Min Input Voltage="7 V", Min Operating Temperature="0 degC", Nominal Output Voltage="5 V", Package Quantity=50, ComponentLink1Description="Manufacturer URL", ComponentLink1URL=http://www.foxonline.com/, ComponentLink2Description=Datasheet, ComponentLink2URL=http://download.siliconexpert.com/pdfs/2015/4/5/6/5/7/200/fox_/manual/35607121449963728hc49slf.pdf, DatasheetVersion=Mar-15, Height="30.02 mm", Length="10.24 mm", Mount="Surface Mount", Output Current="1 A", Output Voltage="5 V", Outputs=1, PackageDescription="2-Pin Through Hole Device, Body 11.35 x 4.65 mm", PackageReference=FOXSLF080-20, Packaging=Rail/Tube, Pins=3, Radiation Hardening=No, REACH SVHC="No SVHC", RoHSCompliant=true, Width="9.35 mm"

## Free pads (board coordinates)
  round 2.178 hole 2: MH1(0,16.2) MH2(0,-16.2)

## Via types
v1: diameter 0.45, hole 0.2, Top Layer to Bottom Layer, 37 vias

## Nets (pads, with @x,y where several pads share a name; then routed paths per layer and width w, separated by ;. In a path a pad name is that pad's centre, name@x,y a point inside that pad or via, vN(x,y) a via of type N, cw(c..) or ccw(c..) an arc to the next point about the centre after c; other vN are vias at no path point)
+3V3: C1.1 C7.1 J2.2 J3.2 J4.2 R1.2 R2.2 R3.2 R4.2 U1.4 U1.6 U1.18 | length 60.4
  Mid Layer 1 w0.762: v1(-6.858,-11.989) 1.937,-11.989 2.267,-12.319 v1(2.286,-12.319) 4.62,-9.985 4.62,-6.022 4.648,-5.994 4.648,-3.226 4.318,-2.896 4.318,-2.139 5.111,-1.346 ; v1(0.315,5.883) 0.315,4.866 0.559,4.622 0.559,3.444 1.005,2.997 4.583,2.997 5.029,2.551 5.029,-1.264 5.111,-1.346 ; v1@0.457,5.842 0.457,6.715 -0.234,7.406 -0.792,7.964 -3.462,7.964 -3.745,8.247 -3.745,10.372 -3.462,10.655 -3.328,10.655 -2.881,11.101 -2.881,11.107 -2.4,11.589 J3.2 -0.791,13.459 3.656,13.459 J2.2 6.579,11.85 J4.2 ; v1(7.315,-3.048) 6.679,-3.048 5.564,-1.932 5.564,-1.798 5.111,-1.346
  Bottom Layer w0.381: R1.2 -5.157,11.849 J3.2
  other v1: 4.318,-2.877
"+3V7 Battery": C8.1 C12.1 IC3.5 J5.1 R6.2 U2.1 U2.3 | length 26.4
  Mid Layer 1 w0.762: J5.1 -6.329,-7.6 -4.756,-9.173 -0.151,-9.173 1.881,-7.141 2.435,-7.141 v1(3.759,-5.817) ; v1(6.427,-1.534) 7.655,-1.534 8.331,-2.21 v1(8.331,-5.131)
  Mid Layer 2 w0.762: v1(3.759,-5.817) 4.445,-5.131 v1(8.331,-5.131)
"-3V7 Battery": C11.2 IC2.6 J5.2 Q1.6
GND: C1.2 C2.2 C3.2 C4.2 C5.2 C6.2 C7.2 C8.2 C9.2 C10.2 C12.2 IC1.4 IC1.8 IC3.1 IC3.3 IC3.9 J1.6 J2.6 Q1.2 R5.1 R7.1 R10.1 S1.3 S1.4 S2.3 S2.4 U1.3 U1.5 U1.21 U2.2 | length 163.9
  Top Layer w0.381: IC3.3 -7.62,5.458 ; IC3.9 -7.62,4.146 -7.62,5.458 ; R10.1 -6.216,7.788 -5.08,6.652 -5.08,6.426 -4.92,6.266 -4.92,5.651 -4.025,5.651 v1(-4.013,5.639) ; C12.2 -6.459,-1.459 -6.459,-1.477 -6.484,-1.7 -6.484,-2.015 -6.459,-2.491 C8.2 -4.17,-2.925 -3.284,-2.04 -2.725,-2.04 v1(-2.725,-2.75) ; IC3.1 -5.08,5.356 ; IC1.4 -2.712,-1.475 -2.489,-1.252 -1.829,-1.252 -1.657,-1.081 -1.657,1.305 0.354,3.316 0.354,4.562 0.577,4.785 1.237,4.785 R5.1 1.319,3.898 1.319,3.267 IC1.8@2.681,1.905 ; C4.2 -2.476,4.524 -4.005,2.995 -4.345,2.995 -5.08,3.731 -5.08,5.356 ; -0.941,-7.853 0.237,-7.853 Q1.2 ; J2.6 -0.077,11.588 -0.077,11.272 0.862,10.255 1.302,9.773 1.302,8.849 3.632,6.519 3.632,6.067 4.619,5.08 6.128,5.08 6.299,4.909 6.299,3.267 6.128,3.096 4.391,3.096 3.335,2.04 2.847,2.04 IC1.8 ; C5.2 5.693,-8.057 6.58,-8.057 6.789,-7.849 v1(6.807,-7.849) 8.894,-7.849 8.9,-7.842 8.926,-7.842 10.137,-6.631 J1.6 ; -7.62,5.458 -7.315,5.153 -5.283,5.153 -5.08,5.356
  Mid Layer 1 w0.762: v1(-2.725,-2.75) -2.794,-2.819 -2.794,-6.385 v1(-1.143,-8.036)
  Mid Layer 2 w0.762: v1(-4.013,5.639) -3.829,5.823 -3.829,11.094 -3.767,11.156 -3.767,13.447 -3.32,13.894 -1.859,13.894 J2.6 ; v1(2.184,-7.874) 2.184,-6.02 v1(2.921,-5.283)
  Bottom Layer w0.381: S1.3@-14.825,7.175 S1.3@-14.767,7.175 ; C2.2 -5.842,-9.24 -5.535,-9.547 -4.366,-9.547 -2.67,-8.747 -2.016,-8.747 ; S2.4 S2.3 -15.85,0.85 -16.18,1.18 -16.18,5.763 S1.3@-14.767,7.175 ; v1(-4.013,5.639) -4.013,6.713 -4.475,7.175 -7.493,7.175 -9.01,5.657 -10.818,5.657 -12.336,7.175 S1.3@-14.767,7.175 ; R7.1 -2.725,-3.9 v1(-2.725,-2.75) ; v1(-1.143,-8.036) -1.162,-8.036 -1.375,-8.249 -1.518,-8.249 -2.016,-8.747 ; J2.6 1.6,10.435 1.6,8.855 2.686,7.769 4.267,7.769 5.08,6.956 5.08,4.153 5.283,3.95 C9.2 5.75,3.654 6.198,3.654 6.604,3.248 6.604,2.207 ; v1(2.184,-7.874) 2.184,-8.29 2.642,-8.747 ; C3.2 2.535,-4.897 v1(2.921,-5.283) v1@2.921,-5.265 ; U1.5 3.98,-10.347 4.16,-10.167 4.577,-10.167 4.771,-9.973 4.771,-9.111 ; C7.2 4.605,0.335 5.029,0.759 6.299,0.759 6.604,0.454 ; U2.2 6.604,0.454 ; v1(6.807,-7.849) 5.971,-8.685 5.197,-8.685 4.771,-9.111 ; C10.2 7.51,5.304 8.18,5.304 8.611,4.874 8.611,1.978 8.331,1.699 7.112,1.699 6.604,2.207 ; -2.016,-8.747 2.642,-8.747 ; 2.642,-8.747 4.407,-8.747 4.771,-9.111 ; 6.604,0.454 6.604,2.207
MISO: J1.2 J2.1 U1.16 | length 42
  Bottom Layer w0.381: U1.16 -3.416,-13.281 -3.244,-13.11 2.489,-13.11 2.718,-13.338 7.772,-13.338 9.525,-11.586 9.525,-0.623 J1.2 12.786,3.369 8.233,7.922 6.653,7.922 J2.1
MOSI: J1.3 J2.3 U1.15 | length 50.2
  Mid Layer 2 w0.381: v1(-1.945,-15.458) -1.945,-7.908 -1.529,-7.493 -0.842,-7.493 1.998,-4.653 1.998,-4.568 2.891,-3.675 3.666,-3.675 3.893,-3.902 8.746,-3.902 J1.3
  Bottom Layer w0.381: U1.15 -2.616,-14.786 v1(-1.945,-15.458) ; J2.3 4.004,10.589 11.582,10.589 12.344,9.827 12.344,5.097 12.568,4.874 14.122,4.874 14.529,4.467 14.529,1.881 J1.3
NetC2_1: C2.1 U1.20 | length 2
  Bottom Layer w0.381: C2.1 -6.275,-10.536 -5.4,-10.536 -5.212,-10.347 U1.20
NetC4_1: C4.1 R2.1 S2.1 S2.2 | length 29.7
  Top Layer w0.381: C4.1 -1.543,6.144 -1.218,6.469 -1.218,7.188 -1.194,7.213 v1(-1.194,7.231)
  Bottom Layer w0.381: S2.1 S2.2 -4.425,-3.65 -3.916,-3.14 -3.916,-0.808 -2.007,1.101 -2.007,6.419 v1(-1.194,7.231) 2.598,7.231 3.852,5.977 R2.1
NetC9_1: C9.1 C10.1 D1.2 J4.1 U2.5 | length 11.4
  Top Layer w0.381: v1(6.934,7.137) 6.916,7.137 6.866,7.088 D1.2 5.717,7.598 6.213,7.598 J4.1
  Bottom Layer w0.381: v1(6.934,7.137) 6.934,7.129 5.89,6.085 C10.1 5.89,5.615 7.095,4.409 7.491,4.409 7.65,4.25 C9.1 7.602,3.902 7.602,2.557 U2.5
NetC11_1: C11.1 IC2.5 R6.1 | length 9.7
  Top Layer w0.381: C11.1 -4.554,-9.919 -3.417,-9.919 v1(-3.404,-9.906) -3.39,-9.919 -3.39,-10.041 -3.381,-10.05 -3.381,-10.645 -3.315,-10.711 -2.527,-10.711 IC2.5
  Bottom Layer w0.381: R6.1 -5.259,-14.442 -3.323,-12.506 -3.323,-11.295 v1(-3.404,-9.906)
NetD1_1: D1.1 R5.2 | length 4.4
  Top Layer w0.381: R5.2 1.88,6.311 2.319,5.872 2.319,5.77 4.001,4.088 D1.1
NetD2_1: D2.1 R8.2 | length 16.5
  Mid Layer 1 w0.381: v1(-4.961,8.534) -4.947,8.521 -4.947,7.815 -3.941,6.809 -2.807,6.809 -0.837,4.838 -0.837,4.738 v1(-0.189,4.091)
  Bottom Layer w0.381: D2.1 -9.476,12.93 -8.144,11.598 -7.147,11.598 -6.325,10.776 -6.325,9.289 -5.583,8.548 -4.974,8.548 v1(-4.961,8.534) ; v1(-0.189,4.091) 0.683,4.091 0.798,3.975 R8.2
NetD3_1: D3.1 R9.2 | length 13.6
  Mid Layer 1 w0.381: v1(-5.817,13.03) -5.817,10.588 -4.418,9.19 -4.418,7.968 -3.741,7.291 -2.021,7.291 -1.379,6.649 v1(-0.565,6.649)
  Bottom Layer w0.381: D3.1 -7.342,13.03 v1(-5.817,13.03) ; R9.2 -1,6.195 -0.565,6.63 v1(-0.565,6.649)
NetIC1_1: IC1.1 IC1.2 J3.1 | length 12.4
  Top Layer w0.381: IC1.2 -2.757,0.635 -2.757,1.905 IC1.1 -2.32,1.905 -1.361,2.864 -1.141,2.864 -0.743,3.262 -0.631,3.373 -0.631,3.689 -0.731,3.866 -0.731,4.315 -0.631,5.704 -0.52,5.816 0.421,6.757 v1(0.421,7.787)
  Bottom Layer w0.381: J3.1 -0.878,7.787 v1(0.421,7.787)
NetIC1_6: IC1.6 R4.1 U1.27 | length 22
  Top Layer w0.381: v1(1.346,-0.61) 1.365,-0.61 1.39,-0.635 3.149,-0.635 3.767,-1.252 3.767,-2.351 3.561,-2.557 3.561,-3.205 4.009,-3.653 7.65,-3.653 8.683,-2.62 8.683,0.264 7.643,1.304 R4.1
  Bottom Layer w0.381: U1.27 -1.816,-2.851 0.425,-0.61 v1(1.346,-0.61)
NetIC1_7: IC1.7 R3.1 U1.28 | length 16.2
  Top Layer w0.381: IC1.7 3.104,0.635 3.778,-0.038 5.658,-0.038 5.845,-0.225 5.845,-1.891 5.588,-2.148 v1(5.588,-3.108)
  Mid Layer 2 w0.381: v1(-1.067,-6.95) 2.807,-3.077 3.75,-3.077 4.093,-3.42 4.543,-3.42 4.841,-3.121 5.575,-3.121 v1(5.588,-3.108)
  Bottom Layer w0.381: v1(-1.067,-6.95) -1.054,-6.937 -1.054,-6.648 -1.048,-6.643 -1.048,-5.829 U1.28
NetIC2_2: IC2.2 R7.2 | length 12.1
  Top Layer w0.381: v1(-1.075,-2.877) -1.686,-3.488 -1.686,-8.26 -0.799,-9.147 0.734,-9.147 0.999,-9.412 0.999,-10.342 0.828,-10.513 0.715,-10.513 0.382,-10.846 IC2.2
  Bottom Layer w0.381: v1(-1.075,-2.877) -1.075,-3.65 R7.2
NetIC3_2: IC3.2 R10.2 | length 3.3
  Top Layer w0.381: R10.2 -8.516,8.105 -8.257,7.846 -7.56,7.846 -6.35,6.635 IC3.2
NetIC3_6: IC3.6 R9.1 | length 10.7
  Top Layer w0.254: v1(-9.169,3.683) -9.169,2.415 -8.733,1.979 -8.387,1.979 -7.62,1.211 IC3.6
  Bottom Layer w0.254: v1(-9.169,3.683) -5.98,3.683 -5.298,4.365
  Bottom Layer w0.381: -5.298,4.365 -4.676,4.988 -2.913,4.988 R9.1
NetIC3_7: IC3.7 R8.1 | length 11.7
  Top Layer w0.381: IC3.7 -6.35,1.211 -5.599,1.962 -4.355,1.962 -2.812,3.505 -2.352,3.505 -2.254,3.406 v1(-1.365,3.406)
  Mid Layer 2 w0.381: v1(-1.365,3.406) 1.031,3.406 1.333,3.708 1.874,3.708 1.896,3.73 v1(2.861,3.73)
  Bottom Layer w0.381: v1(2.861,3.73) 3.43,3.73 R8.1
OC: IC2.3 Q1.5 | length 7.1
  Top Layer w0.381: Q1.5 -4.346,-6.518 -0.968,-9.896 IC2.3
OD: IC2.1 Q1.4 | length 7.2
  Top Layer w0.381: IC2.1 0.241,-11.661 0.946,-11.661 1.482,-11.126 1.482,-9.25 1.46,-9.229 1.46,-6.982 1.031,-6.552 0.306,-6.552 Q1.4
RESET: C3.1 J2.5 R1.1 S1.1 S1.2 U1.29 | length 46.2
  Top Layer w0.381: v1(-4.064,3.962) -3.48,4.547 -3.454,4.547 -2.883,5.118 -2.883,6.717 -1.677,7.924 -1.201,7.924 J2.5
  Mid Layer 1 w0.381: v1(-5.182,-5.461) -5.182,3.429 -4.661,3.949 -4.077,3.949 v1(-4.064,3.962)
  Bottom Layer w0.381: S1.1@-14.825,2.675 -11.34,2.675 -10.025,1.36 -7.4,1.36 -6.853,1.907 -6.853,2.128 -6.306,2.675 -4.574,2.675 -4.064,3.185 v1(-4.064,3.962) ; v1(-5.182,-5.461) -3.15,-7.493 -0.61,-7.493 -0.234,-7.117 -0.234,-5.815 U1.29 -0.216,-5.366 0.915,-4.235 C3.1 ; R1.1 -3.879,9.92 -3.631,10.167 -3.631,10.216 -3.383,10.464 -0.969,10.464 J2.5
SCK: J1.4 J2.4 U1.17 | length 51.4
  Top Layer w0.381: J2.4 4.115,10.46 4.115,6.267 4.819,5.563 6.328,5.563 13.517,-1.626 J1.4
  Mid Layer 1 w0.381: v1(-7.645,-14.1) 4.953,-14.1 6.147,-12.906 6.147,-9.728 13.362,-2.513 13.362,-1.786 J1.4
  Bottom Layer w0.381: v1(-7.645,-14.1) -7.569,-14.024 -7.569,-13.719 -5.893,-13.719 -5.461,-13.287 -5.461,-12.747 U1.17
SS: J1.5 U1.14 | length 21.7
  Mid Layer 2 w0.381: v1(-1.397,-15.065) 4.33,-9.338 9.921,-9.338 12.525,-6.734 12.525,-6.22 13.106,-5.639 13.294,-5.639 13.517,-5.416 J1.5
  Bottom Layer w0.381: U1.14 -1.816,-14.786 v1(-1.397,-15.065)
VCC: D2.2 D3.2 IC3.4 IC3.8 J1.1 | length 39
  Mid Layer 2 w0.762: v1(-10.125,6.2) -10.125,2.265 -7.435,-0.425 v1(-4.3,-0.425) -2.681,1.194 -2.681,3.127 -0.985,4.824 0.292,4.824 1.827,6.359 12.752,6.359 12.923,6.188 13.198,6.188 J1.1
  Bottom Layer w0.5: v1(-10.125,6.2) -10.125,9.48 -9.675,9.93 D2.2 -9.563,9.943 -7.429,9.943 D3.2
XTAL1: C5.1 U1.7 Y1.2 | length 9.7
  Top Layer w0.381: v1(4.801,-11.913) 5.131,-11.582 C5.1
  Bottom Layer w0.381: U1.7 4.748,-11.947 4.782,-11.913 v1(4.801,-11.913) 4.801,-11.011 7.35,-8.462 7.35,-7.578 7.207,-7.435 7.207,-6.452 Y1.2
XTAL2: C6.1 U1.8 Y1.1 | length 6.6
  Top Layer w0.381: Y1.1 8.01,-10.215 8.338,-10.215 C6.1@8.9,-9.654
  Bottom Layer w0.381: U1.8 5.478,-12.747 Y1.1
pads on no net: IC1.3 IC1.5 IC2.4 Q1.1 Q1.3 Q1.7 Q1.8 U1.1 U1.2 U1.9 U1.10 U1.11 U1.12 U1.13 U1.19 U1.22 U1.23 U1.24 U1.25 U1.26 U1.30 U1.31 U1.32 U2.4

## Other copper
Top Layer:
  region net "-3V7 Battery": -11.836,-12.116 -11.814,-12.093 -7.874,-12.093 -7.874,-12.402 -7.852,-12.424 -5.326,-12.424 -5.326,-11.762 -3.715,-11.762 -3.594,-12.424 -3.715,-13.13 -3.726,-13.141 -3.737,-13.13 -11.824,-13.13
  region net +3V3: 6.772,-0.369 8.2,-0.369 8.188,-0.381 8.188,-2.702 7.546,-3.344 7.54,-3.338 6.79,-3.338
  region net +3V3: 4.073,-0.357 4.073,-1.692 4.089,-2.972 4.216,-3.124 4.746,-3.124 4.762,-2.64 4.817,-2.171 5.205,-1.782 5.54,-1.782 5.548,-1.089 5.54,-0.432 5.548,-0.349 5.54,-0.357
  region net GND: 1.753,-7.315 1.829,-9.474 3.404,-9.591 3.404,-8.585 2.863,-8.585 2.718,-8.44 2.718,-7.315
  region net +3V3: 1.854,-10.058 3.425,-10.058 3.425,-12.7 1.833,-12.7
  region net NetIC1_7: 1.905,1.025 1.93,1 3.95,1 4.178,1.854 5.728,1.854 5.728,0.579 5.628,0.479 5.567,0.54 4.278,0.54 4.278,0.029 4.249,0 1.905,0
  region net "+3V7 Battery": -11.875,-8.6 -9.525,-8.6 -9.5,-8.575 -9.5,-3.45 -11.825,-3.45
  region net "-3V7 Battery": -6.723,-6.675 -6.748,-6.65 -9.275,-6.65 -9.275,-8.95 -9.35,-8.95 -11.825,-8.95 -11.825,-13.125 -11.8,-13.15 -7.875,-13.15 -7.875,-7.65 -7.925,-7.6 -6.723,-7.6
  region net VCC: -5.45,1.625 -3.85,1.625 -3.825,1.6 -3.825,-1.525 -5.425,-1.525
  region net VCC: -9.325,7.1 -8.35,7.1 -8.35,5.425 -9.399,5.425 -10.599,4.225 -12.475,4.225 -12.475,7.975 -10.675,7.975
  region net "+3V7 Battery": -8.509,1.75 -8.509,-0.225 -7.425,-0.225 -7.425,-4.15 -7.45,-4.175 -11.825,-4.175 -11.825,1.75 -10,1.75 -10.775,1.75 -10,1.75
  region net "-3V7 Battery": -3.725,-11.75 -3.225,-11.925 -3,-11.975 -1.725,-11.975 -1.725,-12.775 -3,-12.775 -3.725,-13.175
  region net "-3V7 Battery": -6.4,-6.9 -4.85,-6.9 -4.85,-7.425 -6.4,-7.425 -6.723,-7.6 -7.925,-7.6 -7.925,-6.675 -6.723,-6.675
Mid Layer 1:
  region net +3V3: 3.745,-2.373 3.77,-2.347 4.752,-2.347 4.752,-3.425 4.786,-3.46 6.902,-3.46 6.924,-2.4 7.797,-2.359 7.797,-4.394 7.814,-4.412 7.786,-4.44 4.236,-4.44 4.236,-3.362 4.218,-3.345 4.213,-3.351 3.748,-3.351
Bottom Layer:
  region net +3V3: 2.806,-9.875 4.456,-9.875 4.456,-9.255 4.479,-9.232 1.802,-9.232 1.802,-12.711 1.795,-12.719 1.818,-12.742 2.689,-12.742 2.689,-11.515 2.72,-11.546 4.386,-11.546 4.386,-10.806 4.356,-10.775 4.332,-10.798 2.802,-10.798 2.751,-10.38 2.802,-9.919
  region net +3V3: -5.347,-11.604 -5.322,-11.629 -4.1,-11.629 -4.1,-12.239 -4.093,-12.245 -4.121,-12.273 -5.768,-12.273 -5.814,-12.318 -7.404,-12.318 -7.404,-11.647 -7.389,-11.631
  region net +3V3: 1.272,6.603 1.283,6.592 2.519,6.592 2.519,5.164 2.508,5.153 -0.216,5.153 -0.216,6.598 -0.205,6.609
  region net +3V3: 3.142,-0.728 4.784,-0.728 4.8,-0.744 4.774,-0.77 4.774,-3.132 4.748,-3.159 3.896,-3.159 3.896,-2.907 3.896,-2.674 3.787,-2.565 3.189,-2.565
  region net "+3V7 Battery": 6.025,0.425 6.025,-0.875 7.05,-0.875 7.05,0.45 7.075,0.475 8.45,0.475 8.45,-2.4 5.398,-2.4 5.334,0.425
  region net "+3V7 Battery": -7.374,-13.31 -5.975,-13.31 -5.975,-12.471 -7.6,-12.471 -7.6,-6.65 -11.5,-6.65 -11.525,-6.675 -11.525,-8.475 -9.65,-8.475 -9.4,-8.725 -9.4,-13.31

## Silkscreen, mask and mechanical layers (free items; w line width, h text height)
Top Overlay:
  circle w0.3: c5.271,2.936 r0.031
  circle w0.3: c-2.775,2.6 r0.05
  circle w0.3: c0.325,-9.05 r0.035
  circle w0.3: c1.175,-12.4 r0.035
  circle w0.3: c-5.075,7.6 r0.025
Bottom Overlay:
  circle w0.3: c5.283,13.716 r0.072
  circle w0.3: c-2.175,-0.125 r0.103
  circle w0.3: c-2.1,2.05 r0.079
Mechanical 1:
  circle w0.3: c0,0 r18
Board:
  circle w0.3: c0,0 r18